# EAGLE board BAM_Reference_R2_0 (EAGLE 6.6.0)
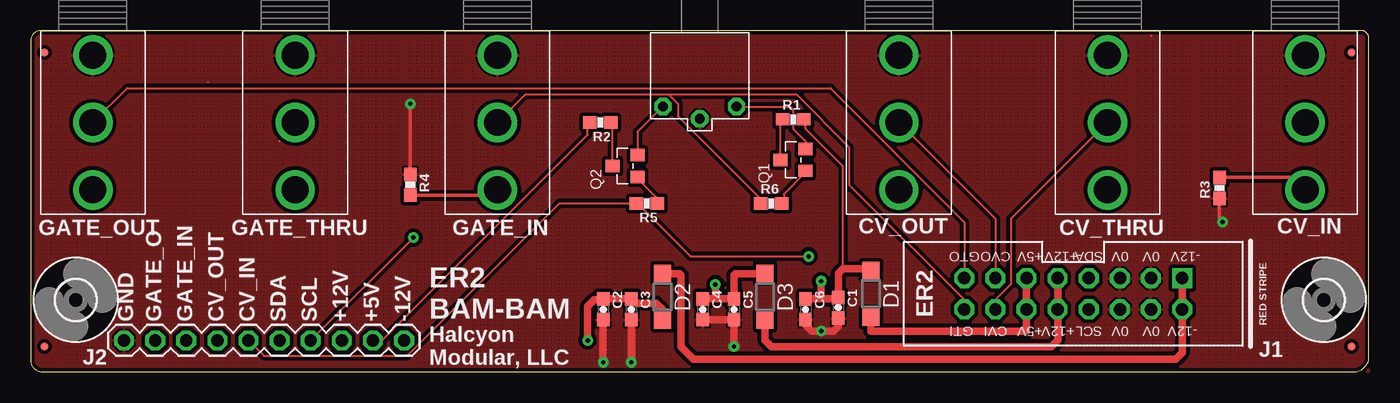
[diagram p0: board, top side]
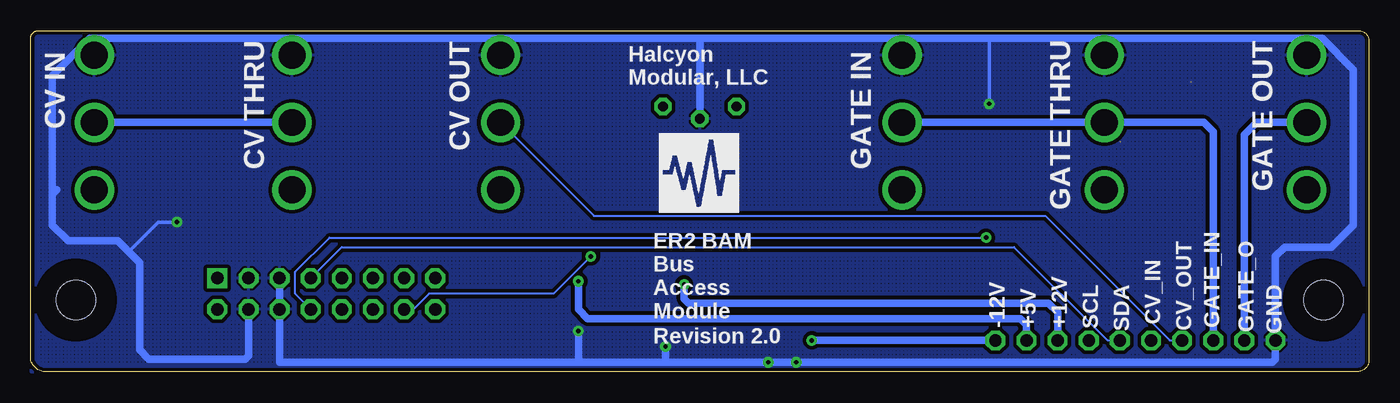
[diagram p1: board, bottom side, seen from below]

Size 109.22 x 27.84 mm. Coordinates in mm from the lower left corner, seen from the top.
Outline: 0.9,0.03 107.72,0.03 arc90 109.22,1.02 109.22,27.2 arc90 108.58,27.84 0.81,27.84 arc90 0,27.03 0,0.92 arc90 0.9,0.03
Copper layers (1*16): Top 0.035mm / dielectric 1.5mm / Bottom 0.035mm
Design rules "PatternAgents_7mil": minimum track width 7mil, minimum drill 14mil, track to track 7mil, track to pad 7mil, pad to pad 7mil, via to via 7mil, smd to smd 7mil, copper to edge 7mil, drill to drill 7mil, minimum pad ring 12mil, minimum via ring 10mil, stop-mask expansion 4mil, vias tented up to drill 25mil, thermal gap 7mil
Net classes: 1 power: width 0.254 mm, drill 0.356 mm, clearance 0.178 mm

## Footprints (pad centres in the part's own frame; a part is rotated, then mirrored left to right if it is on the bottom)
0603-CAP = smd 1.1 x 1: 1 -0.85,0; 2 0.85,0
MJ-3502 = drill 2.2: SLEEVE -5.5,0; TIP 0,0; TIP_SW 5.5,0
SOD123 = smd 1.4 x 1.4: A 1.9,0; C -1.9,0
MICRO-FIDUCIAL = smd 0.635 x 0.635: 1 0,0
3,2,SMALL = hole 3.2: 0,0
ER2 = drill 1.016 square: 1 -8.89,-1.27 | drill 1.016 octagon: 2 -8.89,1.27; 3 -6.35,-1.27; 4 -6.35,1.27; 5 -3.81,-1.27; 6 -3.81,1.27; 7 -1.27,-1.27; 8 -1.27,1.27; 9 1.27,-1.27; 10 1.27,1.27; 11 3.81,-1.27; 12 3.81,1.27; 13 6.35,-1.27; 14 6.35,1.27; 15 8.89,-1.27; 16 8.89,1.27
1X10_OCTO = drill 1 octagon: 1 0,0; 2 2.54,0; 3 5.08,0; 4 7.62,0; 5 10.16,0; 6 12.7,0; 7 15.24,0; 8 17.78,0; 9 20.32,0; 10 22.86,0
LED-RG-PANEL = drill 0.8 octagon: CC 0,3.5; GREEN 3,2.5; RED -3,2.5
SOT-23 = smd 1.016 x 1.143: 1 -0.889,-1.016; 2 0.889,-1.016; 3 0,1.016
0603-RES = smd 1.1 x 1: 1 -0.85,0; 2 0.85,0

## Placement (x,y rotation side)
C1  100nF  [0603-CAP]  65.91,5.23 270 top
C2  1uF  [0603-CAP]  46.74,5.11 270 top
C3  100nF  [0603-CAP]  49.02,5.11 270 top
C4  100nF  [0603-CAP]  54.86,5.11 270 top
C5  1uF  [0603-CAP]  57.4,5.11 270 top
C6  1uF  [0603-CAP]  63.25,5.11 270 top
CV_IN  JACK-3_5MM-MONO-SW-MJ_3502  [MJ-3502]  104.01,20.35 270 top
CV_OUT  JACK-3_5MM-MONO-SW-MJ_3502  [MJ-3502]  70.87,20.35 270 top
CV_THRU  JACK-3_5MM-MONO-SW-MJ_3502  [MJ-3502]  87.88,20.35 270 top
D1  1N5819HW  [SOD123]  68.58,6.38 270 top
D2  1N5819HW  [SOD123]  51.56,6.12 270 top
D3  1N5819HW  [SOD123]  59.94,6.12 270 top
FID1  FIDUCIALUFIDUCIAL  [MICRO-FIDUCIAL]  1.14,26.06 0 top
FID2  FIDUCIALUFIDUCIAL  [MICRO-FIDUCIAL]  107.82,26.06 0 top
FID3  FIDUCIALUFIDUCIAL  [MICRO-FIDUCIAL]  1.14,2.06 0 top
FID4  FIDUCIALUFIDUCIAL  [MICRO-FIDUCIAL]  107.82,2.06 90 top
GATE_IN  JACK-3_5MM-MONO-SW-MJ_3502  [MJ-3502]  38.1,20.35 270 top
GATE_OUT  JACK-3_5MM-MONO-SW-MJ_3502  [MJ-3502]  5.08,20.35 270 top
GATE_THRU  JACK-3_5MM-MONO-SW-MJ_3502  [MJ-3502]  21.59,20.35 270 top
H1  MOUNT-HOLE3,2S  [3,2,SMALL]  3.68,5.87 0 top
H2  MOUNT-HOLE3,2S  [3,2,SMALL]  105.54,5.87 0 top
J1  ER2-SHROUD  [ER2]  85.09,6.38 180 top
J2  [1X10_OCTO]  7.62,2.57 0 top
LED1  LED-RG-CC-PTH-G18500  [LED-RG-PANEL]  54.61,24.16 180 top
Q1  BSS138W-7-F  [SOT-23]  62.23,17.3 90 top
Q2  BSS138W-7-F  [SOT-23]  48.51,16.79 90 top
R1  100  [0603-RES]  62.23,20.6 0 top
R2  100  [0603-RES]  46.48,20.35 180 top
R3  100K  [0603-RES]  97.03,15.01 90 top
R4  100K  [0603-RES]  30.99,15.27 270 top
R5  4K7  [0603-RES]  50.29,13.74 180 top
R6  4K7  [0603-RES]  60.45,13.74 0 top
U$3  [WAVE]  57.91,12.98 0 bottom

## Library data of the parts
C1-C6 = oXo_Passives
CV_IN GATE_IN = oXo_Connectors
CV_OUT CV_THRU GATE_OUT GATE_THRU = halcyonmod_Connectors
D1-D3 = diode
FID1-FID4 = TSOC-ESP8266-BASE
H1 H2 = oXo_Hardware
J1 = EuroRack_R2_0
J2 = halcyonmod_Connectors; PROD_ID: CONN-11563
LED1 = halcyonmod_Optoelectronics
Q1 Q2 = Seeed-Transistor-2016; MPN: BSS138W-7-F
R1-R6 = halcyonmod_Passives
U$3 = haycyonmod_Logos

## Nets
5V0: C1.1 C6.1 D1.C J2.9 R1.2 R2.2
5V0_ER2: D1.A J1.11 J1.12
12V0: C4.1 C5.1 D3.C J2.8
12V0_ER2: D3.A J1.9 J1.10
CVI_ER2: CV_IN.TIP CV_THRU.TIP J1.14 J2.5 R5.2
CVO_ER2: CV_OUT.TIP J1.13 J2.4
CVO_ER2_NORM: CV_OUT.TIP_SW
GND: C1.2 C2.2 C3.2 C4.2 C5.2 C6.2 CV_IN.SLEEVE CV_OUT.SLEEVE CV_THRU.SLEEVE GATE_IN.SLEEVE GATE_OUT.SLEEVE GATE_THRU.SLEEVE J1.3 J1.4 J1.5 J1.6 J2.1 LED1.CC R3.1 R4.1
GTI_ER2: GATE_IN.TIP GATE_THRU.TIP J1.16 J2.3 R6.1
GTO_ER2: GATE_OUT.TIP J1.15 J2.2
GTO_ER2_NORM: GATE_OUT.TIP_SW
N12V0: C2.1 C3.1 D2.A J2.10
N12V0_ER2: D2.C J1.1 J1.2
N$1: LED1.GREEN Q2.2
N$2: LED1.RED Q1.2
N$3: Q2.3 R2.1
N$4: Q1.3 R1.1
N$5: Q2.1 R5.1
N$6: Q1.1 R6.2
N$7: CV_IN.TIP_SW R3.2
N$8: GATE_IN.TIP_SW R4.2
SCL_ER2: J1.8 J2.7
SDA_ER2: J1.7 J2.6

## Tracks (layer width: path | path; a pad name or v marks a point on that pad's centre or on a via)
5V0  (via drill 0.36)
  Top 0.178: J2.9 28.7,2.57 45.47,19.33 45.47,20.35 R2.2 | 66.29,8.41 66.29,16.79 63.25,19.84 63.25,20.6 R1.2
  Top 0.61: C6.1 64.26,5.96 | 64.26,5.96 65.79,5.96 C1.1 65.91,8.03 66.29,8.41 68.45,8.41 D1.C | v64.52,7.39 64.52,6.21 64.26,5.96
  Bottom 0.61: J2.9 27.94,3.84 28.45,4.34 63.75,4.34 64.52,5.11 v64.52,7.39
5V0_ER2
  Top 0.61: D1.A 68.58,3.33 81.28,3.33 J1.12 J1.11
12V0  (via drill 0.36)
  Top 0.61: D3.C 57.53,8.02 57.4,7.9 C5.1 55.88,5.96 | 55.88,5.96 C4.1 | v55.88,7.14 55.88,5.96
  Bottom 0.61: J2.8 25.4,4.85 26.16,5.61 55.54,5.61 55.88,5.96 v55.88,7.14
12V0_ER2
  Top 0.61: D3.A 59.94,2.57 60.45,2.06 83.31,2.06 83.82,2.57 J1.10 J1.9
CVI_ER2  (via drill 0.36)
  Top 0.178: J1.14 78.74,5.87 80.01,7.14 80.01,12.47 CV_THRU.TIP | J2.5 19.05,1.3 30.73,1.3 43.18,13.74 R5.2 49.53,13.74 53.85,9.42 v63.5,9.42
  Bottom 0.178: J1.14 77.98,5.11 76.71,6.38 66.55,6.38 v63.5,9.42
  Bottom 0.61: CV_THRU.TIP CV_IN.TIP
CVO_ER2
  Top 0.178: J1.13 78.74,12.47 CV_OUT.TIP
  Bottom 0.178: J2.4 16.26,2.57 26.42,12.73 63.25,12.73 CV_OUT.TIP
GND  (via drill 0.36)  (2 unrouted)
  Top 0.178: 58.67,23.65 58.67,23.66 | 91.44,7.39 J1.3 | 91.44,27.46 91.44,27.41
  Top 0.305: R4.1 v30.99,21.87 | R3.1 97.03,12.47 v97.28,12.22
  Top 0.61: C3.2 v49.02,0.79 | C2.2 v46.74,0.79 | C4.2 C5.2 v57.4,2.06 | C6.2 63.25,3.84 63.75,3.33 v64.52,3.33 65.53,3.33 65.91,3.71 C1.2
  Bottom 0.305: v30.99,21.87 30.99,27.2 | v97.28,12.22 98.81,12.22 101.22,9.8
  Bottom 0.61: 57.4,0.79 v49.02,0.79 v46.74,0.79 7.87,0.79 7.62,1.04 J2.1 7.62,9.42 6.86,10.19 3.05,10.19 1.27,11.96 1.27,24.66 3.81,27.2 5.08,27.2 | 57.4,0.79 64.26,0.79 | 64.26,0.79 88.9,0.79 J1.6 J1.5 | J1.4 91.44,1.3 91.69,1.04 99.57,1.04 100.33,1.8 100.33,8.92 101.22,9.8 102.11,10.69 106.17,10.69 107.44,11.96 107.44,14.5 | 107.44,14.5 107.44,24.16 104.39,27.2 103.89,27.2 | 103.89,27.2 87.88,27.2 | 87.88,27.2 70.61,27.2 | 70.61,27.2 54.61,27.2 | 54.61,27.2 38.61,27.2 | 38.61,27.2 30.99,27.2 21.84,27.2 | 21.84,27.2 5.08,27.2 | v57.4,2.06 57.4,0.79 | v64.52,3.33 64.52,1.04 64.26,0.79 | GATE_OUT.SLEEVE 5.08,27.2 | GATE_THRU.SLEEVE 21.59,26.95 21.84,27.2 | GATE_IN.SLEEVE 38.1,26.7 38.61,27.2 | LED1.CC 54.61,27.2 | CV_OUT.SLEEVE 70.87,26.95 70.61,27.2 | CV_THRU.SLEEVE 87.88,27.2 | CV_IN.SLEEVE 104.01,27.08 103.89,27.2 | 107.1,14.85 107.44,14.5
  pour Top (isolate 0.305, hatched): 0,0.03 0,27.84 109.22,27.84 109.22,0.03
  pour Bottom (isolate 0.305, hatched): 0,0.03 0,27.84 109.22,27.84 109.22,0.03
GTI_ER2
  Top 0.178: 52.07,22.63 52.83,21.87 52.83,20.85 59.44,14.25 59.44,13.74 R6.1 | 52.07,22.63 40.39,22.63 GATE_IN.TIP | J1.16 76.2,5.87 66.8,15.27 66.8,18.31 62.48,22.63 52.07,22.63
  Bottom 0.61: GATE_IN.TIP GATE_THRU.TIP 13.46,20.35 12.7,19.58 J2.3
GTO_ER2
  Top 0.178: J1.15 76.2,12.22 65.28,23.14 7.87,23.14 GATE_OUT.TIP
  Bottom 0.61: J2.2 10.16,19.33 9.14,20.35 GATE_OUT.TIP
N12V0  (via drill 0.36)
  Top 0.61: D2.A 51.56,5.11 51.05,5.61 49.36,5.61 C3.1 C2.1 46.65,5.87 45.97,5.87 45.47,5.36 v45.47,2.57
  Bottom 0.61: J2.10 v45.47,2.57
N12V0_ER2
  Top 0.61: D2.C 52.96,8.02 53.09,7.9 53.09,2.06 54.1,1.04 93.47,1.04 93.98,1.55 J1.2 J1.1
N$1
  Top 0.178: Q2.2 49.53,19.58 51.56,21.62 LED1.GREEN
N$2
  Top 0.178: Q1.2 63.25,18.82 62.23,19.84 62.23,21.36 61.98,21.62 57.66,21.62 LED1.RED
N$3
  Top 0.178: Q2.3 47.5,20.35 R2.1
N$4
  Top 0.178: Q1.3 61.21,20.6 R1.1
N$5
  Top 0.178: R5.1 51.05,13.74 51.05,14.25 49.53,15.77 Q2.1
N$6
  Top 0.178: R6.2 61.47,13.74 61.47,14.5 63.25,16.28 Q1.1
N$7
  Top 0.305: R3.2 103,15.86 CV_IN.TIP_SW
N$8
  Top 0.305: R4.2 37.67,14.42 GATE_IN.TIP_SW
SCL_ER2  (via drill 0.36)
  Top 0.178: v31.24,10.95 J2.7
  Bottom 0.178: v31.24,10.95 84.84,10.95 87.63,8.15 87.63,6.38 J1.8
SDA_ER2
  Bottom 0.178: J2.6 21.34,2.57 28.96,10.19 83.82,10.19 J1.7

## Text on the board
tPlace: ER2 | GND | GATE_O | GATE_IN | CV_OUT | CV_IN | SDA | SCL | +12V | +5V | -12V | BAM-BAM | Halcyon / Modular, LLC
bPlace: Halcyon / Modular, LLC | CV IN | CV OUT | GATE IN | CV THRU | GATE OUT | GATE THRU | GATE_O | GATE_IN | CV_OUT | CV_IN | GND | SDA | SCL | +12V | +5V | -12V | ER2 BAM / Bus / Access / Module | Revision 2.0